# EAGLE board Koala_Bear (EAGLE 6.5.0)
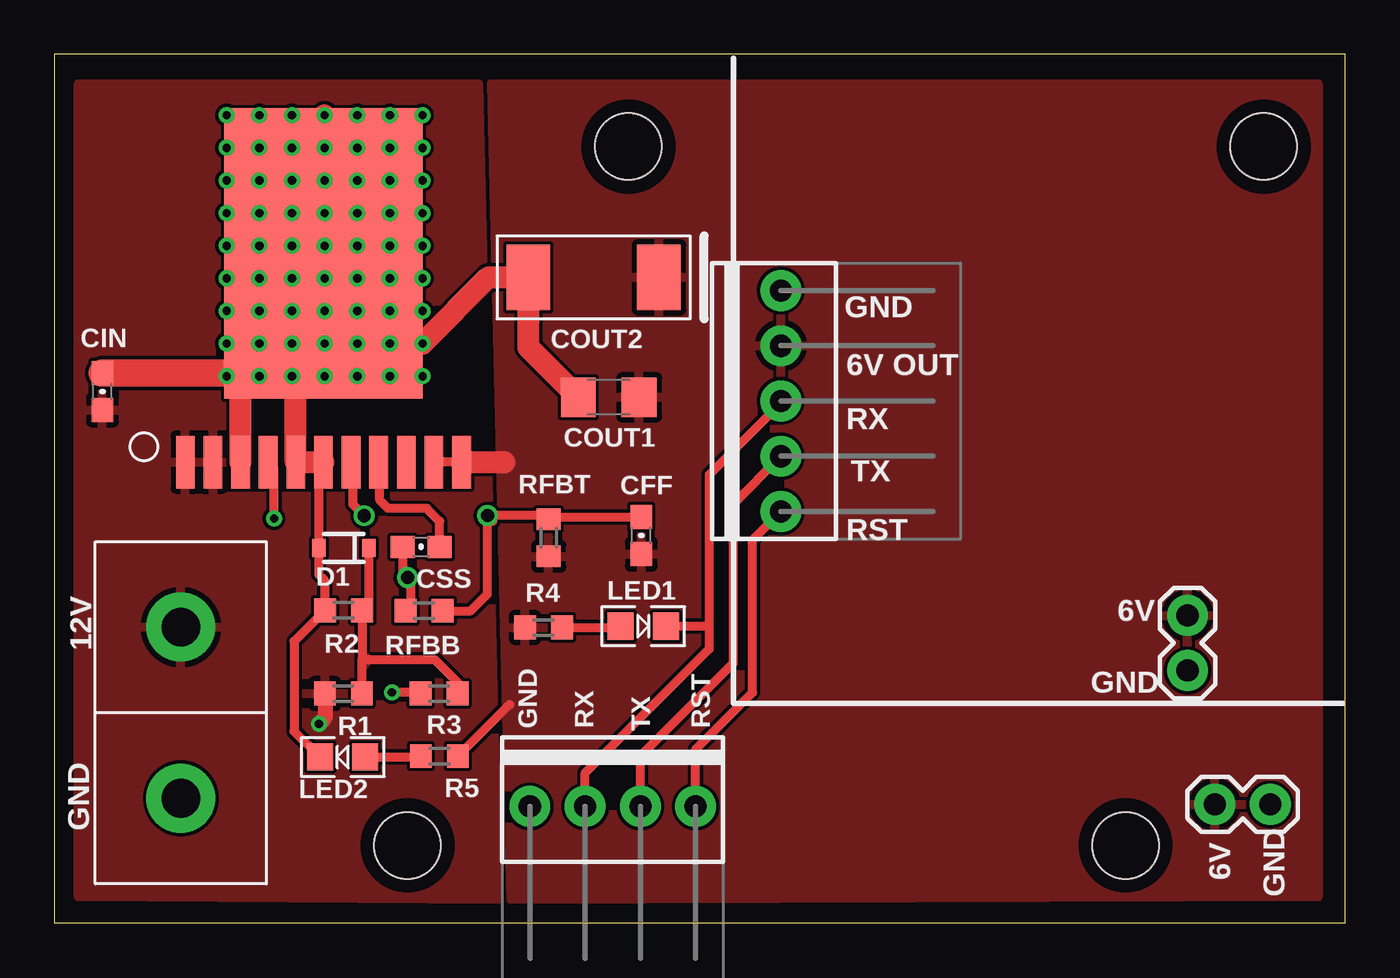
[diagram p0: board, top side]
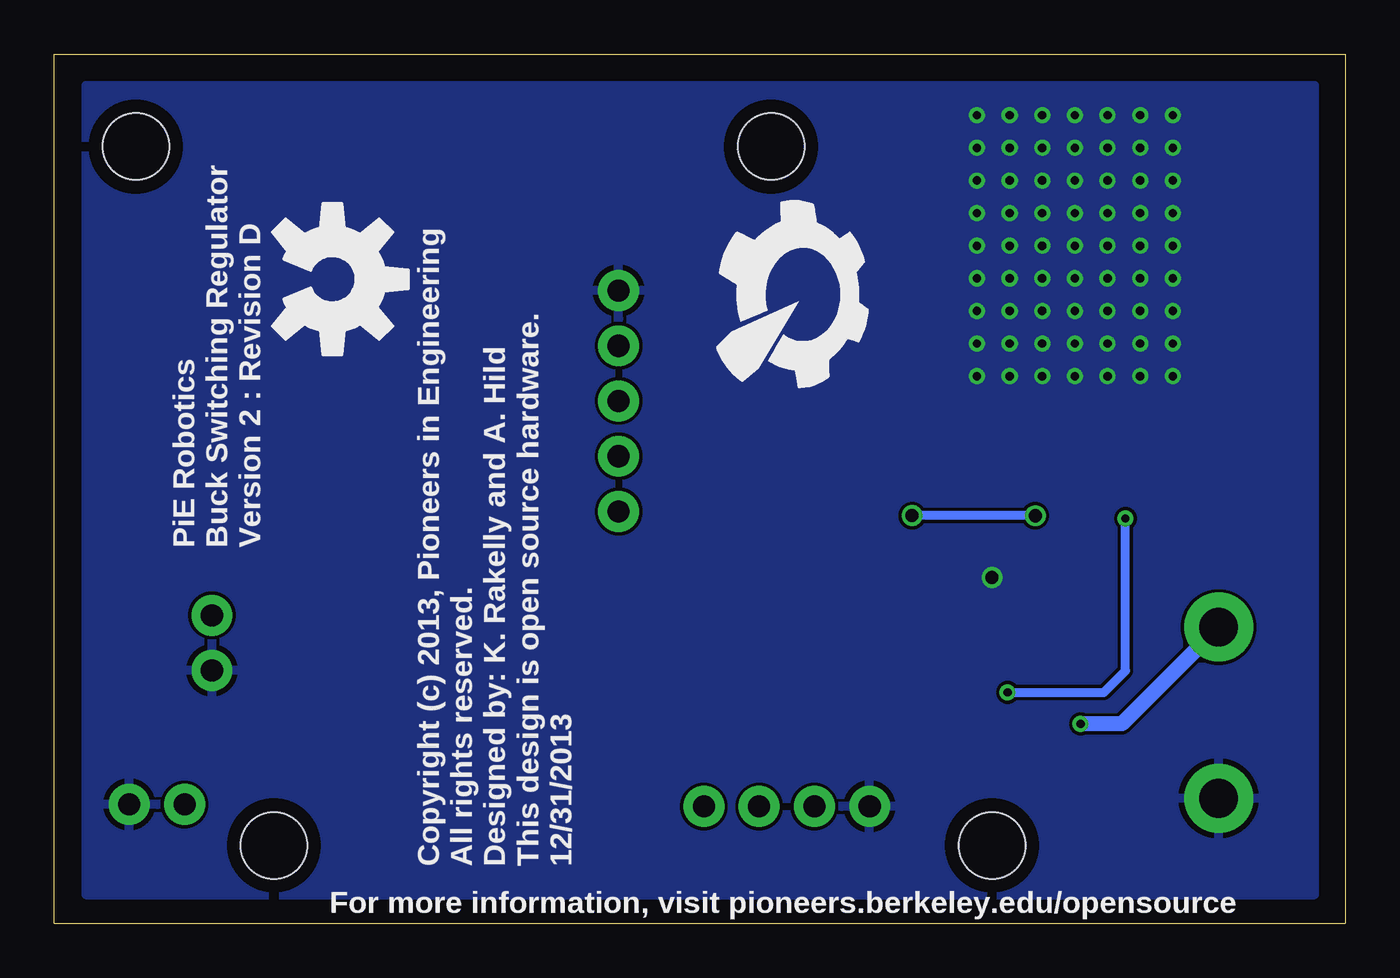
[diagram p1: board, bottom side, seen from below]

Size 59.34 x 39.95 mm. Coordinates in mm from the lower left corner, seen from the top.
Outline: 59.34,0 59.34,39.95 0,39.95 0,0 59.34,0
Copper layers (1*16): Top 2mil / dielectric 9mil / Bottom 2mil
Design rules "advancedcircuits-33each-pie *": minimum track width 6mil, minimum drill 15mil, track to track 6mil, track to pad 10mil, pad to pad 6mil, via to via 6mil, smd to smd 6mil, copper to edge 25mil, drill to drill 7mil, minimum pad ring 7mil, minimum via ring 7mil, stop-mask expansion 3mil, vias tented up to drill 24mil, thermal gap 10mil

## Footprints (pad centres in the part's own frame; a part is rotated, then mirrored left to right if it is on the bottom)
0603-CAP = smd 1.1 x 1: 1 -0.85,0; 2 0.85,0
1206 = smd 1.6 x 1.8: 1 -1.4,0; 2 1.4,0
TANT_CASE_E = smd 2 x 3: NEG 3,0; POS -3,0
SOD-323 = smd 0.63 x 0.83: 1 -1.15,0; 2 1.15,0
LED-0805 = smd 1.194 x 1.245: A -1.041,0; C 1.041,0
1X04-MTA = drill 1.016 pad 1.88: 1 -3.81,0; 2 -1.27,0; 3 1.27,0; 4 3.81,0
1X05-MTA = drill 1.016 pad 1.88: 1 -5.08,0; 2 -2.54,0; 3 0,0; 4 2.54,0; 5 5.08,0
ANDERSON_VERTICAL = drill 1.778 pad 3.175: PIN1 0,-3.937; PIN2 0,3.937
R0603 = smd 1 x 1.1: 1 -0.85,0; 2 0.85,0
1X02 = drill 1.016 pad 1.88: 1 -1.27,0; 2 1.27,0
LMZ12010 = smd 0.861 x 2.41: 1 -6.35,-9.601; 2 -5.08,-9.601; 3 -3.81,-9.601; 4 -2.54,-9.601; 5 -1.27,-9.601; 6 0,-9.601; 7 1.27,-9.601; 8 2.54,-9.601; 9 3.81,-9.601; 10 5.08,-9.601; 11 6.35,-9.601 | smd 9.119 x 13.36: GND 0,0
STAND-OFF-TIGHT = hole 3.048: 0,0

## Placement (x,y rotation side)
CFF  4.7nf  [0603-CAP]  26.99,17.82 90 top
CIN  10uF  [0603-CAP]  2.21,24.45 90 top
COUT1  47uF  [1206]  25.48,24.18 180 top
COUT2  470uF  [TANT_CASE_E]  24.79,29.7 180 top
CSS  .47uF  [0603-CAP]  16.87,17.3 180 top
D1  5.1V  [SOD-323]  13.31,17.25 180 top
LED1  GRN  [LED-0805]  27.07,13.66 0 top
LED2  YEL  [LED-0805]  13.26,7.64 180 top
MSTRO_PINS  [1X04-MTA]  25.67,5.37 0 top
MSTRO_PWR  [1X05-MTA]  33.4,24.01 90 top
PWR  ANDERSONVERTICAL  [ANDERSON_VERTICAL]  5.82,9.68 0 top
R1  60k  [R0603]  13.29,10.56 180 top
R2  30k  [R0603]  13.3,14.39 0 top
R3  100  [R0603]  17.69,10.56 180 top
R4  330  [R0603]  22.49,13.6 180 top
R5  330  [R0603]  17.7,7.68 0 top
RFBB  2.37k  [R0603]  17,14.37 180 top
RFBT  15.4k  [R0603]  22.73,17.72 270 top
SERVO_PWR_6  [1X02]  52.1,12.89 270 top
SERVO_PWR_12  [1X02]  54.63,5.46 180 top
U$1  LMZ12010  [LMZ12010]  12.37,30.8 0 top
U$2  [STAND-OFF-TIGHT]  55.6,35.71 0 top
U$3  [STAND-OFF-TIGHT]  49.25,3.58 0 top
U$4  [STAND-OFF-TIGHT]  26.39,35.71 0 top
U$5  [STAND-OFF-TIGHT]  16.23,3.58 0 top
U$10  [PIE-LOGO-SMALL]  25.1,28.61 270 bottom
U$11  [OSHW-LOGO-L]  46.56,29.61 270 bottom

## Library data of the parts
CFF CIN CSS LED1 LED2 R1-R5 RFBB RFBT SERVO_PWR_6 SERVO_PWR_12 U$2-U$5 U$11 = pie
COUT1 D1 = SparkFun
COUT2 = TANT_CASE_E
MSTRO_PINS = pie_new; PARTNUMBER: A1922-ND
MSTRO_PWR = pie; PARTNUMBER: A19471-ND
PWR = pie; PARTNUMBER: 1377G3
U$1 = LMZ12010
U$10 = pie_new

## Nets
DIODE: D1.1 R1.1 R2.2 R3.1
EN: R3.2 U$1.4
FB: CFF.2 RFBB.1 RFBT.1 U$1.7
GND: CIN.2 COUT1.2 COUT2.NEG CSS.2 D1.2 LED2.C MSTRO_PINS.1 MSTRO_PWR.5 PWR.PIN1 R2.1 RFBB.2 SERVO_PWR_6.2 SERVO_PWR_12.1 U$1.3 U$1.5 U$1.6 U$1.GND
N$1: LED1.A R4.1
N$5: LED2.A R5.1
RST: MSTRO_PINS.4 MSTRO_PWR.1
RX: LED1.C MSTRO_PINS.2 MSTRO_PWR.3
SS: CSS.1 U$1.8
TX: MSTRO_PINS.3 MSTRO_PWR.2
VIN: CIN.1 PWR.PIN2 R1.2 U$1.1 U$1.2
VOUT: CFF.1 COUT1.1 COUT2.POS MSTRO_PWR.4 R4.2 R5.2 RFBT.2 SERVO_PWR_6.1 SERVO_PWR_12.2 U$1.10 U$1.11

## Tracks (layer width: path | path; a pad name or v marks a point on that pad's centre or on a via)
DIODE
  Top 0.406: R1.1 14.14,12.11 | 14.14,12.11 17.5,12.11 18.54,11.07 R3.1 | 14.14,12.11 14.15,12.12 R2.2 14.46,14.7 D1.1
  pour Top: 14.33,11.83 14.45,11.96 14.45,12.22 14.33,12.34 14.07,12.34 14.07,11.83
  pour Top: 29.95,13.87 29.82,13.74 29.82,13.49 29.95,13.36 30.17,13.36 30.17,13.87
EN  (via drill 0.38)
  Top 0.406: v10.1,18.61 10.1,20.93 U$1.4 | R3.2 16.79,10.61 v15.52,10.61
  Bottom 0.406: v15.52,10.61 11.1,10.61 10.1,11.61 v10.1,18.61
FB  (via drill 0.6)
  Top 0.406: U$1.7 13.72,21.12 13.72,19.27 v14.24,18.74 | 20.16,18.48 v19.91,18.74 | CFF.2 22.82,18.67 RFBT.1 22.56,18.74 v19.91,18.74 | 20.17,18.48 v19.91,18.74 | RFBB.1 19.14,14.37 19.91,15.14 v19.91,18.73 v19.91,18.74
  Bottom 0.406: v14.24,18.74 v14.25,18.74 v19.91,18.74
GND  (via drill 0.38 pad 0.3, 0.6)
  Top 0.152: 12.42,20.47 12.4,20.47 | 11.15,26.82 11.15,26.61 11.15,25.55 11.1,25.55
  Top 0.406: 12.4,20.47 12.4,21.17 12.37,21.17 U$1.6 | v10.93,26.65 11.15,26.65 11.15,26.61 | v15.43,28.15 15.1,28.15 15.1,27.61 | 12.42,20.47 12.16,20.21 D1.2 12.16,16.03 12.42,15.77 12.42,14.41 R2.1 11.02,12.96 11.02,8.83 LED2.C | 16.15,14.46 RFBB.2 16.4,14.62 16.4,15.73 v16.23,15.9 16.02,16.11 CSS.2
  Top 1.016: 10.9,26.01 11.1,25.81 11.1,25.55 U$1.5 U$1.6 | U$1.GND 12.37,37.02 arc-45 v12.43,37.15 | U$1.3 8.56,25.17 9.05,25.66 | v7.92,25.15 7.95,25.15 8.1,25.3 | 15.21,27.72 15.1,27.61 | 15.62,27.95 v15.43,28.15 | v16.93,26.65 19.97,29.7 COUT2.NEG 21.79,26.47 COUT1.2
  Top 1.27: 16.12,25.85 v15.43,25.15 | CIN.2 8.1,25.3 8.69,25.3 9.05,25.66 9.4,26.01
  other vias: 7.92,37.15 7.92,37.15 9.43,37.15 10.93,37.15 13.93,37.15 13.93,37.15 13.93,37.15 15.43,37.15 16.93,37.15 7.92,35.65 7.92,35.65 9.43,35.65 10.93,35.65 13.93,35.65 13.93,35.65 13.93,35.65 15.43,35.65 16.93,35.65 12.43,35.65 7.92,34.15 7.92,34.15 9.43,34.15 10.93,34.15 13.93,34.15 13.93,34.15 13.93,34.15 15.43,34.15 16.93,34.15 12.43,34.15 7.92,32.65 7.92,32.65 9.43,32.65 10.93,32.65 13.93,32.65 13.93,32.65 13.93,32.65 15.43,32.65 16.93,32.65 12.43,32.65 7.92,31.15 7.92,31.15 9.43,31.15 10.93,31.15 13.93,31.15 13.93,31.15 13.93,31.15 15.43,31.15 16.93,31.15 12.43,31.15 7.92,29.65 7.92,29.65 9.43,29.65 10.93,29.65 13.93,29.65 13.93,29.65 13.93,29.65 15.43,29.65 16.93,29.65 12.43,29.65 7.92,28.15 7.92,28.15 9.43,28.15 10.93,28.15 13.93,28.15 13.93,28.15 13.93,28.15 16.93,28.15 12.43,28.15 7.92,26.65 7.92,26.65 9.43,26.65 13.93,26.65 13.93,26.65 13.93,26.65 15.43,26.65 12.43,26.65 9.43,25.15 10.93,25.15 13.93,25.15 13.93,25.15 13.93,25.15 16.93,25.15 12.43,25.15
  pour Bottom: 1.4,38.51 57.9,38.51 57.9,1.31 1.4,1.31
N$1
  Top 0.406: 26.41,13.6 LED1.A 26.03,13.6 R4.1
N$5
  Top 0.406: LED2.A 16.81,7.64 R5.1
RST
  Top 0.406: MSTRO_PINS.4 29.48,7.99 32.1,10.61 32.1,17.63 MSTRO_PWR.1
RX
  Top 0.406: MSTRO_PINS.2 24.4,6.91 30.1,12.61 30.1,13.61 30.1,13.66 | MSTRO_PWR.3 33.4,23.91 30.1,20.61 30.1,13.66 | LED1.C 30.1,13.66
SS
  Top 0.406: CSS.1 17.72,18.47 17.12,19.07 15.34,19.07 14.96,19.45 14.96,21.15 U$1.8
TX
  Top 0.406: MSTRO_PINS.3 26.94,7.68 31.22,11.96 31.22,19.29 MSTRO_PWR.2
VIN  (via drill 0.38 pad 0.74)
  Top 0.686: R1.2 12.44,9.44 v12.17,9.17
  Bottom 0.686: PWR.PIN2 10.26,9.17 v12.17,9.17
  pour Top: 1.1,38.61 19.5,38.61 20.39,1.08 1.1,1.21
VOUT
  Top 0.406: U$1.11 U$1.10 | R5.2 | R5.2 20.93,10.06
  Top 1.016: U$1.11 20.69,21.2
  pour Top: 20.1,38.61 58.1,38.61 58.1,1.21 20.99,1.08

## Text on the board
tPlace: GND | 6V OUT | RX | TX | RST | 6V | 12V | GND | GND | RX | TX | RST | GND | 6V | GND
bPlace: PiE Robotics / Buck Switching Regulator / Version 2 : Revision D | Copyright (c) 2013, Pioneers in Engineering / All rights reserved. / Designed by: K. Rakelly and A. Hild / This design is open source hardware. / 12/31/2013 | For more information, visit pioneers.berkeley.edu/opensource
tValues: 470uF | 10uF | 47uF | 4.7nF | .47uF | 15.4k | 30k | 100 | 2.37k | 60k